# Altium PCB ESP-WROOM32.PcbDoc (part 2 of 3)
Units mm, origin at the board's own origin, x right, y up, seen from the top; angles counter-clockwise.
Board outline 17.3 x 15.5 mm, 2 copper layers (L1, L2); 42 components, 55 nets, 176 pads, 91 vias.
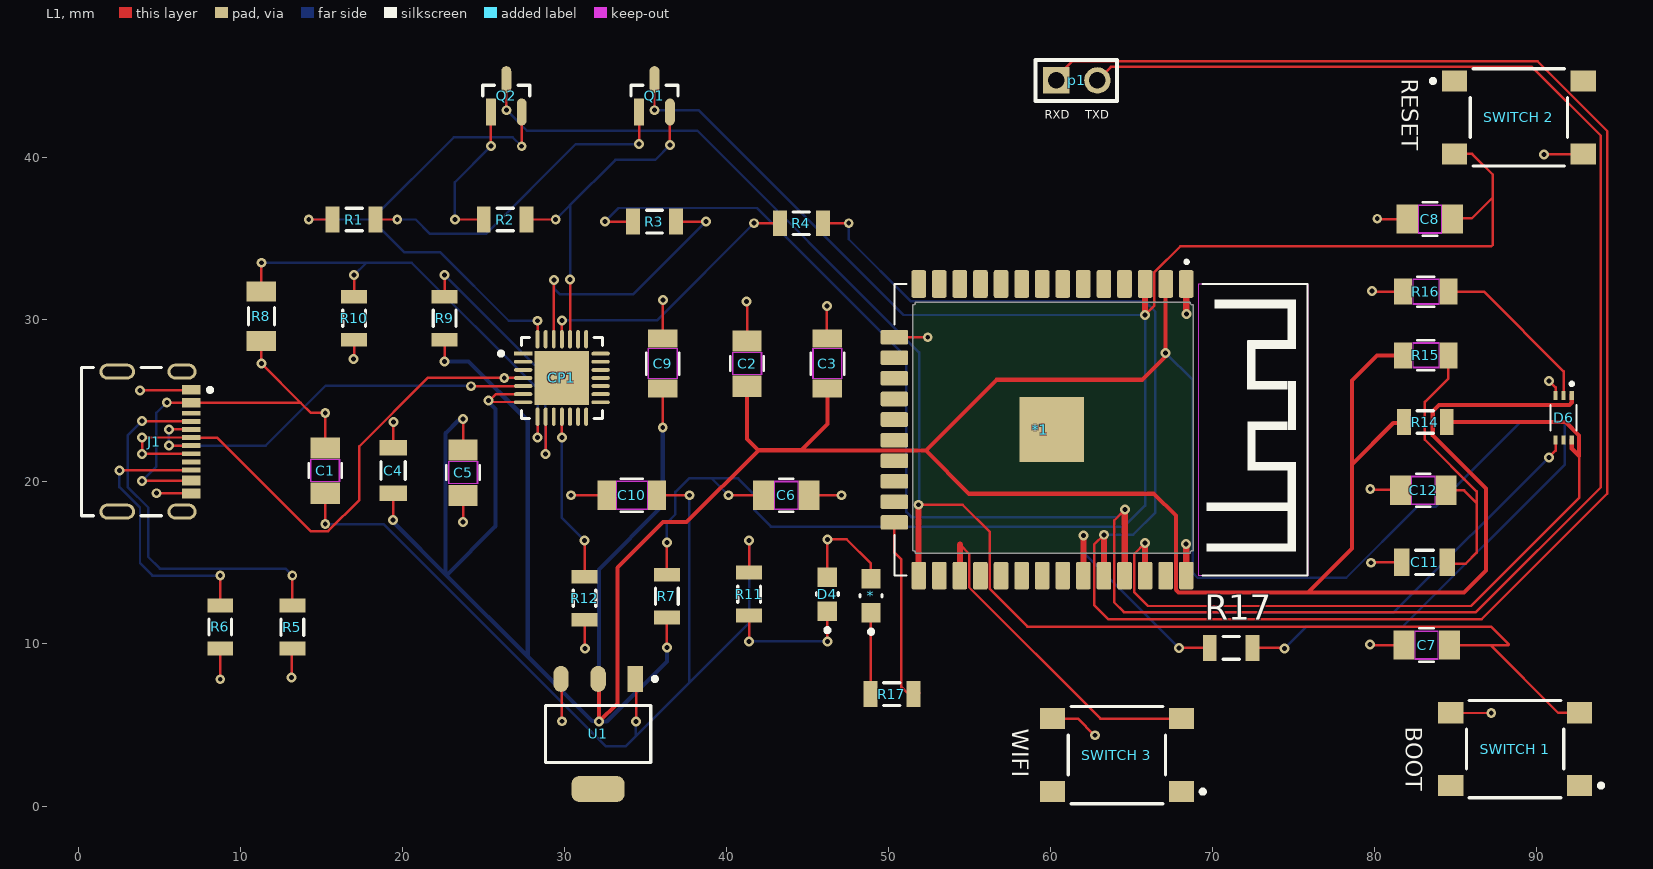
[diagram p0: L1 view]

## Part data (continued)
R5 R6: library part RC1206FR-075K1L, "RES 5.1K OHM 1% 1/4W 1206", Case Code (Imperial)=0402, LCSC part number=C163372, Manufacturer="Yageo Group", Manufacturer Part Number=RC0402FR-075K1L, Max Operating Temperature=155°C, Max Power Dissipation=63mW, Min Operating Temperature=-55°C, Power Dissipation=62.5mW, Supplier Part Number=311-5.10KLRCT-ND, Temperature Coefficient=100ppm/°C, Tolerance=1%, Voltage Rating=50V, Case/Package=0402, Category="Chip SMD Resistors", China RoHS=Non-Compliant, ComponentLink1Description=https://datasheet.octopart.com:443/RC0402FR-075K1L-Yageo-datasheet-175887523.pdf?src-supplier=IHS, ComponentLink1URL=https://datasheet.octopart.com:443/RC0402FR-075K1L-Yageo-datasheet-175887523.pdf?src-supplier=IHS, ComponentLink2Description=https://datasheet.octopart.com:443/RC0402FR-075K1L-Yageo-datasheet-103092701.pdf?src-supplier=Upverter, ComponentLink2URL=https://datasheet.octopart.com:443/RC0402FR-075K1L-Yageo-datasheet-103092701.pdf?src-supplier=Upverter, ComponentLink3Description=https://datasheet.octopart.com:443/RC0402FR-075K1L-Yageo-datasheet-10408619.pdf?src-supplier=Newark, ComponentLink3URL=https://datasheet.octopart.com:443/RC0402FR-075K1L-Yageo-datasheet-10408619.pdf?src-supplier=Newark, ComponentLink4Description=https://datasheet.octopart.com:443/RC0402FR-075K1L-Yageo-datasheet-8324527.pdf?src-supplier=Newark, ComponentLink4URL=https://datasheet.octopart.com:443/RC0402FR-075K1L-Yageo-datasheet-8324527.pdf?src-supplier=Newark, ComponentLink5Description=https://datasheet.octopart.com:443/RC0402FR-075K1L-Yageo-datasheet-62067350.pdf?src-supplier=element14+APAC, ComponentLink5URL=https://datasheet.octopart.com:443/RC0402FR-075K1L-Yageo-datasheet-62067350.pdf?src-supplier=element14+APAC, ComponentLink6Description=https://datasheet.octopart.com:443/RC0402FR-075K1L-Yageo-datasheet-164759695.pdf?src-supplier=Future+Electronics, ComponentLink6URL=https://datasheet.octopart.com:443/RC0402FR-075K1L-Yageo-datasheet-164759695.pdf?src-supplier=Future+Electronics, ComponentLink7Description=https://datasheet.octopart.com:443/RC0402FR-075K1L-Yageo-datasheet-137700087.pdf?src-supplier=Future+Electronics, ComponentLink7URL=https://datasheet.octopart.com:443/RC0402FR-075K1L-Yageo-datasheet-137700087.pdf?src-supplier=Future+Electronics, ComponentLink8Description=https://datasheet.octopart.com:443/RC0402FR-075K1L-Yageo-datasheet-12531192.pdf?src-supplier=Future+Electronics, ComponentLink8URL=https://datasheet.octopart.com:443/RC0402FR-075K1L-Yageo-datasheet-12531192.pdf?src-supplier=Future+Electronics, ComponentLink9Description=https://datasheet.octopart.com:443/RC0402FR-075K1L-Yageo-datasheet-505231.pdf?src-supplier=Future+Electronics, ComponentLink9URL=https://datasheet.octopart.com:443/RC0402FR-075K1L-Yageo-datasheet-505231.pdf?src-supplier=Future+Electronics, ComponentLink10Description=https://datasheet.octopart.com:443/RC0402FR-075K1L-Yageo-datasheet-148775077.pdf?src-supplier=TME, ComponentLink10URL=https://datasheet.octopart.com:443/RC0402FR-075K1L-Yageo-datasheet-148775077.pdf?src-supplier=TME, ComponentLink11Description=https://datasheet.octopart.com/RC0402FR-075K1L-Yageo-datasheet-73766026.pdf, ComponentLink11URL=https://datasheet.octopart.com/RC0402FR-075K1L-Yageo-datasheet-73766026.pdf, ComponentLink12Description=https://datasheet.octopart.com:443/RC0402FR-075K1L-Yageo-datasheet-8329306.pdf?src-supplier=element14, ComponentLink12URL=https://datasheet.octopart.com:443/RC0402FR-075K1L-Yageo-datasheet-8329306.pdf?src-supplier=element14, ComponentLink13Description=http://sigma.octopart.com:80/rohs_statement/Yageo-company-2.pdf?src-supplier=Compliance+Statements, ComponentLink13URL=http://sigma.octopart.com:80/rohs_statement/Yageo-company-2.pdf?src-supplier=Compliance+Statements, ComponentLink14Description=http://sigma.octopart.com:80/conflict_mineral_statement/Yageo-company-3.pdf?src-supplier=Compliance+Statements, ComponentLink14URL=http://sigma.octopart.com:80/conflict_mineral_statement/Yageo-company-3.pdf?src-supplier=Compliance+Statements, Composition="Thick Film", Depth=500µm, Features="Moisture Resistant", Height=350µm, Lead Free="Lead Free", Length=1mm, Lifecycle Status=Production, Military Standard=Not, Mounting Technology="Surface Mount", Number of Terminals=2, Number of Terminations=2, Packaging="Cut Tape", Pins=2, Power Rating=63mW, Pricing="1=0.1, 10=0.008, 25=0.0072, 50=0.0062, 100=0.0056, 250=0.00308 (USD)", REACH SVHC=Yes, RoHS=Compliant, Schedule B="8533210045, 8533210045|8533210045, 8533210045|8533210045|8533210045, 8533210045|8533210045|8533210045|8533210045", Stock=251126, Supplier=DigiKey, Termination=SMD/SMT, Voltage Rating (DC)=50V, Width=500µm, Working Voltage=50V
R8: library part RC1206FR-0722K1L, "RES 22.1K OHM 1% 1/4W 1206", Case Code (Imperial)=0402, Case Code (Metric)=1005, LCSC part number=C488737, Manufacturer="Yageo Group", Manufacturer Part Number=AC0402FR-0722K1L, Max Operating Temperature=155°C, Max Power Dissipation=63mW, Min Operating Temperature=-55°C, Power Dissipation=62.5mW, Supplier Part Number=YAG3457CT-ND, Temperature Coefficient=100ppm/°C, Tolerance=1%, Voltage Rating=50V, Case/Package=0402, Category="Chip SMD Resistors", China RoHS=Non-Compliant, ComponentLink1Description=https://datasheet.octopart.com:443/AC0402FR-0722K1L-Yageo-datasheet-182189377.pdf?src-supplier=IHS, ComponentLink1URL=https://datasheet.octopart.com:443/AC0402FR-0722K1L-Yageo-datasheet-182189377.pdf?src-supplier=IHS, ComponentLink2Description=https://datasheet.octopart.com:443/AC0402FR-0722K1L-Yageo-datasheet-83209224.pdf?src-supplier=Upverter, ComponentLink2URL=https://datasheet.octopart.com:443/AC0402FR-0722K1L-Yageo-datasheet-83209224.pdf?src-supplier=Upverter, ComponentLink3Description=https://datasheet.octopart.com:443/AC0402FR-0722K1L-Yageo-datasheet-178509465.pdf?src-supplier=Newark, ComponentLink3URL=https://datasheet.octopart.com:443/AC0402FR-0722K1L-Yageo-datasheet-178509465.pdf?src-supplier=Newark, ComponentLink4Description=https://datasheet.octopart.com:443/AC0402FR-0722K1L-Yageo-datasheet-166720450.pdf?src-supplier=Future+Electronics, ComponentLink4URL=https://datasheet.octopart.com:443/AC0402FR-0722K1L-Yageo-datasheet-166720450.pdf?src-supplier=Future+Electronics, ComponentLink5Description=https://datasheet.octopart.com:443/AC0402FR-0722K1L-Yageo-datasheet-151884373.pdf?src-supplier=Future+Electronics, ComponentLink5URL=https://datasheet.octopart.com:443/AC0402FR-0722K1L-Yageo-datasheet-151884373.pdf?src-supplier=Future+Electronics, ComponentLink6Description=https://datasheet.octopart.com:443/AC0402FR-0722K1L-Yageo-datasheet-137699919.pdf?src-supplier=Future+Electronics, ComponentLink6URL=https://datasheet.octopart.com:443/AC0402FR-0722K1L-Yageo-datasheet-137699919.pdf?src-supplier=Future+Electronics, ComponentLink7Description=https://datasheet.octopart.com:443/AC0402FR-0722K1L-Yageo-datasheet-86786639.pdf?src-supplier=Future+Electronics, ComponentLink7URL=https://datasheet.octopart.com:443/AC0402FR-0722K1L-Yageo-datasheet-86786639.pdf?src-supplier=Future+Electronics, ComponentLink8Description=https://datasheet.octopart.com:443/AC0402FR-0722K1L-Yageo-datasheet-128677973.pdf?src-supplier=X-ON, ComponentLink8URL=https://datasheet.octopart.com:443/AC0402FR-0722K1L-Yageo-datasheet-128677973.pdf?src-supplier=X-ON, ComponentLink9Description=https://datasheet.octopart.com/AC0402FR-0722K1L-Yageo-datasheet-12512238.pdf, ComponentLink9URL=https://datasheet.octopart.com/AC0402FR-0722K1L-Yageo-datasheet-12512238.pdf, ComponentLink10Description=http://sigma.octopart.com:80/rohs_statement/Yageo-company-2.pdf?src-supplier=Compliance+Statements, ComponentLink10URL=http://sigma.octopart.com:80/rohs_statement/Yageo-company-2.pdf?src-supplier=Compliance+Statements, ComponentLink11Description=http://sigma.octopart.com:80/conflict_mineral_statement/Yageo-company-3.pdf?src-supplier=Compliance+Statements, ComponentLink11URL=http://sigma.octopart.com:80/conflict_mineral_statement/Yageo-company-3.pdf?src-supplier=Compliance+Statements, Composition="Thick Film", Features="Automotive AEC-Q200, Moisture Resistant", Height=320µm, Length=990.6µm, Lifecycle Status=Production, Mounting Technology="Surface Mount", Number of Terminals=2, Number of Terminations=2, Packaging="Tape & Reel", Power Rating=62.5mW, Pricing="1=0.1, 10=0.009, 25=0.008, 50=0.0072, 100=0.0066, 250=0.00408, 500=0.00406 (USD)", REACH SVHC=Yes, RoHS=Compliant, Schedule B="8533210045, 8533210045|8533210045|8533210045|8533210045|8533210045", Stock=23159, Supplier=DigiKey, Width=500µm, Working Voltage=50V
R9: library part RC1206JR-132KL, "RES 2K OHM 5% 1/4W 1206", Case Code (Imperial)=0402, Case Code (Metric)=3216, LCSC part number=C108081, Manufacturer="Yageo Group", Manufacturer Part Number=RC0402JR-072KL, Max Operating Temperature=155°C, Min Operating Temperature=-55°C, Power Dissipation=62.5mW, Supplier Part Number=311-2.0KJRCT-ND, Temperature Coefficient=100ppm/°C, Tolerance=5%, Voltage Rating=50V, Case/Package=0402, Category="Chip SMD Resistors", China RoHS=Non-Compliant, ComponentLink1Description=https://datasheet.octopart.com:443/RC0402JR-072KL-Yageo-datasheet-175887523.pdf?src-supplier=Newark, ComponentLink1URL=https://datasheet.octopart.com:443/RC0402JR-072KL-Yageo-datasheet-175887523.pdf?src-supplier=Newark, ComponentLink2Description=https://datasheet.octopart.com:443/RC0402JR-072KL-Yageo-datasheet-10408619.pdf?src-supplier=Farnell, ComponentLink2URL=https://datasheet.octopart.com:443/RC0402JR-072KL-Yageo-datasheet-10408619.pdf?src-supplier=Farnell, ComponentLink3Description=https://datasheet.octopart.com:443/RC0402JR-072KL-Yageo-datasheet-62067350.pdf?src-supplier=Farnell, ComponentLink3URL=https://datasheet.octopart.com:443/RC0402JR-072KL-Yageo-datasheet-62067350.pdf?src-supplier=Farnell, ComponentLink4Description=https://datasheet.octopart.com:443/RC0402JR-072KL-Yageo-datasheet-164759695.pdf?src-supplier=Future+Electronics, ComponentLink4URL=https://datasheet.octopart.com:443/RC0402JR-072KL-Yageo-datasheet-164759695.pdf?src-supplier=Future+Electronics, ComponentLink5Description=https://datasheet.octopart.com:443/RC0402JR-072KL-Yageo-datasheet-137700087.pdf?src-supplier=Future+Electronics, ComponentLink5URL=https://datasheet.octopart.com:443/RC0402JR-072KL-Yageo-datasheet-137700087.pdf?src-supplier=Future+Electronics, ComponentLink6Description=https://datasheet.octopart.com:443/RC0402JR-072KL-Yageo-datasheet-12531192.pdf?src-supplier=Future+Electronics, ComponentLink6URL=https://datasheet.octopart.com:443/RC0402JR-072KL-Yageo-datasheet-12531192.pdf?src-supplier=Future+Electronics, ComponentLink7Description=https://datasheet.octopart.com:443/RC0402JR-072KL-Yageo-datasheet-505231.pdf?src-supplier=Future+Electronics, ComponentLink7URL=https://datasheet.octopart.com:443/RC0402JR-072KL-Yageo-datasheet-505231.pdf?src-supplier=Future+Electronics, ComponentLink8Description=https://datasheet.octopart.com/RC0402JR-072KL-Yageo-datasheet-73766026.pdf, ComponentLink8URL=https://datasheet.octopart.com/RC0402JR-072KL-Yageo-datasheet-73766026.pdf, ComponentLink9Description=https://datasheet.octopart.com:443/RC0402JR-072KL-Yageo-datasheet-8329306.pdf?src-supplier=element14, ComponentLink9URL=https://datasheet.octopart.com:443/RC0402JR-072KL-Yageo-datasheet-8329306.pdf?src-supplier=element14, ComponentLink10Description=https://datasheet.octopart.com:443/RC0402JR-072KL-Yageo-datasheet-8324527.pdf?src-supplier=TME, ComponentLink10URL=https://datasheet.octopart.com:443/RC0402JR-072KL-Yageo-datasheet-8324527.pdf?src-supplier=TME, ComponentLink11Description=http://sigma.octopart.com:80/rohs_statement/Yageo-company-2.pdf?src-supplier=Compliance+Statements, ComponentLink11URL=http://sigma.octopart.com:80/rohs_statement/Yageo-company-2.pdf?src-supplier=Compliance+Statements, ComponentLink12Description=http://sigma.octopart.com:80/conflict_mineral_statement/Yageo-company-3.pdf?src-supplier=Compliance+Statements, ComponentLink12URL=http://sigma.octopart.com:80/conflict_mineral_statement/Yageo-company-3.pdf?src-supplier=Compliance+Statements, ComponentLink13Description=https://datasheet.octopart.com:443/RC1206JR-132KL-Yageo-datasheet-175887523.pdf?src-supplier=IHS, ComponentLink13URL=https://datasheet.octopart.com:443/RC1206JR-132KL-Yageo-datasheet-175887523.pdf?src-supplier=IHS, ComponentLink14Description=https://datasheet.octopart.com:443/RC1206JR-132KL-Yageo-datasheet-164759695.pdf?src-supplier=Future+Electronics, ComponentLink14URL=https://datasheet.octopart.com:443/RC1206JR-132KL-Yageo-datasheet-164759695.pdf?src-supplier=Future+Electronics, ComponentLink15Description=https://datasheet.octopart.com:443/RC1206JR-132KL-Yageo-datasheet-137700087.pdf?src-supplier=Future+Electronics, ComponentLink15URL=https://datasheet.octopart.com:443/RC1206JR-132KL-Yageo-datasheet-137700087.pdf?src-supplier=Future+Electronics, ComponentLink16Description=https://datasheet.octopart.com:443/RC1206JR-132KL-Yageo-datasheet-27233761.pdf?src-supplier=Future+Electronics, ComponentLink16URL=https://datasheet.octopart.com:443/RC1206JR-132KL-Yageo-datasheet-27233761.pdf?src-supplier=Future+Electronics, ComponentLink17Description=https://datasheet.octopart.com:443/RC1206JR-132KL-Yageo-datasheet-13032847.pdf?src-supplier=Future+Electronics, ComponentLink17URL=https://datasheet.octopart.com:443/RC1206JR-132KL-Yageo-datasheet-13032847.pdf?src-supplier=Future+Electronics, ComponentLink18Description=https://datasheet.octopart.com:443/RC1206JR-132KL-Yageo-datasheet-8359522.pdf?src-supplier=Future+Electronics, ComponentLink18URL=https://datasheet.octopart.com:443/RC1206JR-132KL-Yageo-datasheet-8359522.pdf?src-supplier=Future+Electronics, ComponentLink19Description=https://datasheet.octopart.com/RC1206JR-132KL-Yageo-datasheet-73766026.pdf, ComponentLink19URL=https://datasheet.octopart.com/RC1206JR-132KL-Yageo-datasheet-73766026.pdf, Composition="Thick Film", Contact Plating=Tin, Depth=500µm, Height=350µm, Lead Free="Lead Free", Length=1mm, Lifecycle Status=Production, Military Standard=Not, Mounting Technology="Surface Mount", Number of Terminals=2, Packaging="Tape & Reel", Pins=2, Power Rating=62.5mW, Pricing="1=0.1, 10=0.006, 25=0.0056, 50=0.0052, 100=0.0046, 250=0.00416, 500=0.00284 (USD)", Radiation Hardening=No, REACH SVHC=Yes, RoHS=Compliant, Schedule B="8533210045, 8533210045|8533210045|8533210045|8533210045|8533210045", Stock=102655, Supplier=DigiKey, Termination=SMD/SMT, Voltage Rating (DC)=50V, Width=500µm, Working Voltage=50V
R10: library part RC1206FR-0747K5L, "RES 47.5K OHM 1% 1/4W 1206", Case Code (Imperial)=1206, Case Code (Metric)=3216, Case/Package=0402, LCSC part number=C137271, Manufacturer="Yageo Group", Manufacturer Part Number=RC0402FR-1347K5L, Max Operating Temperature=155°C, Max Power Dissipation=250mW, Min Operating Temperature=-55°C, Power Dissipation=62.5mW, Supplier Part Number=13-RC0402FR-1347K5LCT-ND, Temperature Coefficient=100ppm/°C, Tolerance=1%, Voltage Rating=200V, Working Voltage=50V, Category="Chip SMD Resistors", China RoHS=Non-Compliant, ComponentLink1Description=https://datasheet.octopart.com:443/RC0402FR-1347K5L-Yageo-datasheet-175887523.pdf?src-supplier=IHS, ComponentLink1URL=https://datasheet.octopart.com:443/RC0402FR-1347K5L-Yageo-datasheet-175887523.pdf?src-supplier=IHS, ComponentLink2Description=https://datasheet.octopart.com:443/RC0402FR-1347K5L-Yageo-Group-datasheet-189192902.pdf?src-supplier=TME, ComponentLink2URL=https://datasheet.octopart.com:443/RC0402FR-1347K5L-Yageo-Group-datasheet-189192902.pdf?src-supplier=TME, ComponentLink3Description=https://datasheet.octopart.com:443/RC0402FR-1347K5L-Yageo-Group-datasheet-176638170.pdf?src-supplier=TME, ComponentLink3URL=https://datasheet.octopart.com:443/RC0402FR-1347K5L-Yageo-Group-datasheet-176638170.pdf?src-supplier=TME, ComponentLink4Description=https://datasheet.octopart.com/RC0402FR-1347K5L-Yageo-datasheet-73766026.pdf, ComponentLink4URL=https://datasheet.octopart.com/RC0402FR-1347K5L-Yageo-datasheet-73766026.pdf, ComponentLink5Description=https://datasheet.octopart.com:443/RC0402FR-1347K5L-Yageo-datasheet-10408619.pdf?src-supplier=_legacy+Avnet, ComponentLink5URL=https://datasheet.octopart.com:443/RC0402FR-1347K5L-Yageo-datasheet-10408619.pdf?src-supplier=_legacy+Avnet, ComponentLink6Description=http://sigma.octopart.com:80/conflict_mineral_statement/Yageo-company-3.pdf?src-supplier=Compliance+Statements, ComponentLink6URL=http://sigma.octopart.com:80/conflict_mineral_statement/Yageo-company-3.pdf?src-supplier=Compliance+Statements, ComponentLink7Description=http://sigma.octopart.com:80/rohs_statement/Yageo-company-2.pdf?src-supplier=Compliance+Statements, ComponentLink7URL=http://sigma.octopart.com:80/rohs_statement/Yageo-company-2.pdf?src-supplier=Compliance+Statements, ComponentLink8Description=https://datasheet.octopart.com:443/RC1206FR-0747K5L-Yageo-datasheet-175887523.pdf?src-supplier=Newark, ComponentLink8URL=https://datasheet.octopart.com:443/RC1206FR-0747K5L-Yageo-datasheet-175887523.pdf?src-supplier=Newark, ComponentLink9Description=https://datasheet.octopart.com:443/RC1206FR-0747K5L-Yageo-datasheet-103092701.pdf?src-supplier=Upverter, ComponentLink9URL=https://datasheet.octopart.com:443/RC1206FR-0747K5L-Yageo-datasheet-103092701.pdf?src-supplier=Upverter, ComponentLink10Description=https://datasheet.octopart.com:443/RC1206FR-0747K5L-Yageo-Group-datasheet-189192902.pdf?src-supplier=TME, ComponentLink10URL=https://datasheet.octopart.com:443/RC1206FR-0747K5L-Yageo-Group-datasheet-189192902.pdf?src-supplier=TME, ComponentLink11Description=https://datasheet.octopart.com:443/RC1206FR-0747K5L-Yageo-Group-datasheet-176638170.pdf?src-supplier=TME, ComponentLink11URL=https://datasheet.octopart.com:443/RC1206FR-0747K5L-Yageo-Group-datasheet-176638170.pdf?src-supplier=TME, ComponentLink12Description=https://datasheet.octopart.com:443/RC1206FR-0747K5L-Yageo-datasheet-164759695.pdf?src-supplier=Future+Electronics, ComponentLink12URL=https://datasheet.octopart.com:443/RC1206FR-0747K5L-Yageo-datasheet-164759695.pdf?src-supplier=Future+Electronics, ComponentLink13Description=https://datasheet.octopart.com:443/RC1206FR-0747K5L-Yageo-datasheet-137700087.pdf?src-supplier=Future+Electronics, ComponentLink13URL=https://datasheet.octopart.com:443/RC1206FR-0747K5L-Yageo-datasheet-137700087.pdf?src-supplier=Future+Electronics, ComponentLink14Description=https://datasheet.octopart.com:443/RC1206FR-0747K5L-Yageo-datasheet-27233761.pdf?src-supplier=Future+Electronics, ComponentLink14URL=https://datasheet.octopart.com:443/RC1206FR-0747K5L-Yageo-datasheet-27233761.pdf?src-supplier=Future+Electronics, ComponentLink15Description=https://datasheet.octopart.com:443/RC1206FR-0747K5L-Yageo-datasheet-13032847.pdf?src-supplier=Future+Electronics, ComponentLink15URL=https://datasheet.octopart.com:443/RC1206FR-0747K5L-Yageo-datasheet-13032847.pdf?src-supplier=Future+Electronics, ComponentLink16Description=https://datasheet.octopart.com:443/RC1206FR-0747K5L-Yageo-datasheet-8359522.pdf?src-supplier=Future+Electronics, ComponentLink16URL=https://datasheet.octopart.com:443/RC1206FR-0747K5L-Yageo-datasheet-8359522.pdf?src-supplier=Future+Electronics, ComponentLink17Description=https://datasheet.octopart.com/RC1206FR-0747K5L-Yageo-datasheet-73766026.pdf, ComponentLink17URL=https://datasheet.octopart.com/RC1206FR-0747K5L-Yageo-datasheet-73766026.pdf, ComponentLink18Description=https://datasheet.octopart.com:443/RC1206FR-0747K5L-Yageo-datasheet-118639.pdf?src-supplier=DigiKey, ComponentLink18URL=https://datasheet.octopart.com:443/RC1206FR-0747K5L-Yageo-datasheet-118639.pdf?src-supplier=DigiKey, Composition="Thick Film", Contact Plating=Tin, Depth=500µm, Features="Moisture Resistant", Height=350µm, Lead Free="Lead Free", Length=1mm, Lifecycle Status=Production, Military Standard=Not, Mounting Technology="Surface Mount", Number of Terminals=2, Number of Terminations=2, Packaging="Tape & Reel", Power Rating=250mW, Pricing="1=0.1, 10=0.02, 25=0.014, 50=0.0112, 100=0.009, 250=0.00688, 500=0.00566, 1000=0.00474, 5000=0.00328 (USD)", REACH SVHC=Yes, RoHS=Compliant, Schedule B="8533210045, 8533210045|8533210045|8533210045|8533210045|8533210045|8533210045|8533210045|8533210045|8533210045|8533210045|8533210045|8533210045|8533210045|8533210045|8533210045|8533210045, 8533210045|8533210045|8533210045|8533210045|8533210045|8533210045|8533210045|8533210045|8533210045|8533210045|8533210045|8533210045|8533210045|8533210045|8533210045|8533210045|8533210045, 8533210045|8533210045|8533210045|8533210045|8533210045|8533210045|8533210045|8533210045|8533210045|8533210045|8533210045|8533210045|8533210045|8533210045|8533210045|8533210045|8533210045|8533210045", Stock=75939, Supplier=DigiKey, Termination=SMD/SMT, Voltage Rating (DC)=200V, Width=500µm
R14 R17 R17: library part RC1206JR-074K7L, "RES 4.7K OHM 5% 1/4W 1206", Case Code (Imperial)=0402, Case Code (Metric)=3216, LCSC part number=C136458, Manufacturer="Yageo Group", Manufacturer Part Number=RC0402JR-0747KL, Max Operating Temperature=155°C, Max Power Dissipation=63mW, Min Operating Temperature=-55°C, Power Dissipation=62.5mW, Supplier Part Number=311-47KJRCT-ND, Temperature Coefficient=100ppm/°C, Tolerance=5%, Voltage Rating=50V, Case/Package=0402, Category="Chip SMD Resistors", China RoHS=Non-Compliant, ComponentLink1Description=https://datasheet.octopart.com:443/RC0402JR-0747KL-Yageo-datasheet-175887523.pdf?src-supplier=IHS, ComponentLink1URL=https://datasheet.octopart.com:443/RC0402JR-0747KL-Yageo-datasheet-175887523.pdf?src-supplier=IHS, ComponentLink2Description=https://datasheet.octopart.com:443/RC0402JR-0747KL-Yageo-datasheet-10408619.pdf?src-supplier=Newark, ComponentLink2URL=https://datasheet.octopart.com:443/RC0402JR-0747KL-Yageo-datasheet-10408619.pdf?src-supplier=Newark, ComponentLink3Description=https://datasheet.octopart.com:443/RC0402JR-0747KL-Yageo-datasheet-8324527.pdf?src-supplier=Newark, ComponentLink3URL=https://datasheet.octopart.com:443/RC0402JR-0747KL-Yageo-datasheet-8324527.pdf?src-supplier=Newark, ComponentLink4Description=https://datasheet.octopart.com:443/RC0402JR-0747KL-Yageo-datasheet-98239111.pdf?src-supplier=Upverter, ComponentLink4URL=https://datasheet.octopart.com:443/RC0402JR-0747KL-Yageo-datasheet-98239111.pdf?src-supplier=Upverter, ComponentLink5Description=https://datasheet.octopart.com:443/RC0402JR-0747KL-Yageo-datasheet-62067350.pdf?src-supplier=element14+APAC, ComponentLink5URL=https://datasheet.octopart.com:443/RC0402JR-0747KL-Yageo-datasheet-62067350.pdf?src-supplier=element14+APAC, ComponentLink6Description=https://datasheet.octopart.com:443/RC0402JR-0747KL-Yageo-datasheet-176638170.pdf?src-supplier=JRH+Electronics, ComponentLink6URL=https://datasheet.octopart.com:443/RC0402JR-0747KL-Yageo-datasheet-176638170.pdf?src-supplier=JRH+Electronics, ComponentLink7Description=https://datasheet.octopart.com:443/RC0402JR-0747KL-Yageo-datasheet-164759695.pdf?src-supplier=Future+Electronics, ComponentLink7URL=https://datasheet.octopart.com:443/RC0402JR-0747KL-Yageo-datasheet-164759695.pdf?src-supplier=Future+Electronics, ComponentLink8Description=https://datasheet.octopart.com:443/RC0402JR-0747KL-Yageo-datasheet-137700087.pdf?src-supplier=Future+Electronics, ComponentLink8URL=https://datasheet.octopart.com:443/RC0402JR-0747KL-Yageo-datasheet-137700087.pdf?src-supplier=Future+Electronics, ComponentLink9Description=https://datasheet.octopart.com:443/RC0402JR-0747KL-Yageo-datasheet-12531192.pdf?src-supplier=Future+Electronics, ComponentLink9URL=https://datasheet.octopart.com:443/RC0402JR-0747KL-Yageo-datasheet-12531192.pdf?src-supplier=Future+Electronics, ComponentLink10Description=https://datasheet.octopart.com:443/RC0402JR-0747KL-Yageo-datasheet-8324255.pdf?src-supplier=Future+Electronics, ComponentLink10URL=https://datasheet.octopart.com:443/RC0402JR-0747KL-Yageo-datasheet-8324255.pdf?src-supplier=Future+Electronics, ComponentLink11Description=https://datasheet.octopart.com:443/RC0402JR-0747KL-Yageo-datasheet-148775077.pdf?src-supplier=TME, ComponentLink11URL=https://datasheet.octopart.com:443/RC0402JR-0747KL-Yageo-datasheet-148775077.pdf?src-supplier=TME, ComponentLink12Description=https://datasheet.octopart.com/RC0402JR-0747KL-Yageo-datasheet-73766026.pdf, ComponentLink12URL=https://datasheet.octopart.com/RC0402JR-0747KL-Yageo-datasheet-73766026.pdf, ComponentLink13Description=https://datasheet.octopart.com:443/RC0402JR-0747KL-Yageo-datasheet-8329306.pdf?src-supplier=element14, ComponentLink13URL=https://datasheet.octopart.com:443/RC0402JR-0747KL-Yageo-datasheet-8329306.pdf?src-supplier=element14, ComponentLink14Description=http://sigma.octopart.com:80/rohs_statement/Yageo-company-2.pdf?src-supplier=Compliance+Statements, ComponentLink14URL=http://sigma.octopart.com:80/rohs_statement/Yageo-company-2.pdf?src-supplier=Compliance+Statements, ComponentLink15Description=http://sigma.octopart.com:80/conflict_mineral_statement/Yageo-company-3.pdf?src-supplier=Compliance+Statements, ComponentLink15URL=http://sigma.octopart.com:80/conflict_mineral_statement/Yageo-company-3.pdf?src-supplier=Compliance+Statements, ComponentLink16Description=https://datasheet.octopart.com:443/RC1206JR-074K7L-Yageo-datasheet-175887523.pdf?src-supplier=Newark, ComponentLink16URL=https://datasheet.octopart.com:443/RC1206JR-074K7L-Yageo-datasheet-175887523.pdf?src-supplier=Newark, ComponentLink17Description=https://datasheet.octopart.com:443/RC1206JR-074K7L-Yageo-datasheet-12512621.pdf?src-supplier=Newark, ComponentLink17URL=https://datasheet.octopart.com:443/RC1206JR-074K7L-Yageo-datasheet-12512621.pdf?src-supplier=Newark, ComponentLink18Description=https://datasheet.octopart.com:443/RC1206JR-074K7L-Yageo-datasheet-141435363.pdf?src-supplier=Upverter, ComponentLink18URL=https://datasheet.octopart.com:443/RC1206JR-074K7L-Yageo-datasheet-141435363.pdf?src-supplier=Upverter, ComponentLink19Description=https://datasheet.octopart.com:443/RC1206JR-074K7L-Yageo-datasheet-8359522.pdf?src-supplier=element14+APAC, ComponentLink19URL=https://datasheet.octopart.com:443/RC1206JR-074K7L-Yageo-datasheet-8359522.pdf?src-supplier=element14+APAC, ComponentLink20Description=https://datasheet.octopart.com:443/RC1206JR-074K7L-Yageo-datasheet-62067350.pdf?src-supplier=Farnell, ComponentLink20URL=https://datasheet.octopart.com:443/RC1206JR-074K7L-Yageo-datasheet-62067350.pdf?src-supplier=Farnell, ComponentLink21Description=https://datasheet.octopart.com:443/RC1206JR-074K7L-Yageo-datasheet-164759695.pdf?src-supplier=Future+Electronics, ComponentLink21URL=https://datasheet.octopart.com:443/RC1206JR-074K7L-Yageo-datasheet-164759695.pdf?src-supplier=Future+Electronics, ComponentLink22Description=https://datasheet.octopart.com:443/RC1206JR-074K7L-Yageo-datasheet-127823281.pdf?src-supplier=Future+Electronics, ComponentLink22URL=https://datasheet.octopart.com:443/RC1206JR-074K7L-Yageo-datasheet-127823281.pdf?src-supplier=Future+Electronics, ComponentLink23Description=https://datasheet.octopart.com:443/RC1206JR-074K7L-Yageo-datasheet-137700087.pdf?src-supplier=Future+Electronics, ComponentLink23URL=https://datasheet.octopart.com:443/RC1206JR-074K7L-Yageo-datasheet-137700087.pdf?src-supplier=Future+Electronics, ComponentLink24Description=https://datasheet.octopart.com:443/RC1206JR-074K7L-Yageo-datasheet-103092701.pdf?src-supplier=Future+Electronics, ComponentLink24URL=https://datasheet.octopart.com:443/RC1206JR-074K7L-Yageo-datasheet-103092701.pdf?src-supplier=Future+Electronics, ComponentLink25Description=https://datasheet.octopart.com:443/RC1206JR-074K7L-Yageo-datasheet-27233761.pdf?src-supplier=Future+Electronics, ComponentLink25URL=https://datasheet.octopart.com:443/RC1206JR-074K7L-Yageo-datasheet-27233761.pdf?src-supplier=Future+Electronics, ComponentLink26Description=https://datasheet.octopart.com:443/RC1206JR-074K7L-Yageo-datasheet-13032847.pdf?src-supplier=Future+Electronics, ComponentLink26URL=https://datasheet.octopart.com:443/RC1206JR-074K7L-Yageo-datasheet-13032847.pdf?src-supplier=Future+Electronics, ComponentLink27Description=https://datasheet.octopart.com:443/RC1206JR-074K7L-Yageo-datasheet-8324387.pdf?src-supplier=Future+Electronics, ComponentLink27URL=https://datasheet.octopart.com:443/RC1206JR-074K7L-Yageo-datasheet-8324387.pdf?src-supplier=Future+Electronics, ComponentLink28Description=https://datasheet.octopart.com/RC1206JR-074K7L-Yageo-datasheet-73766026.pdf, ComponentLink28URL=https://datasheet.octopart.com/RC1206JR-074K7L-Yageo-datasheet-73766026.pdf, ComponentLink29Description=https://datasheet.octopart.com:443/RC1206JR-074K7L-Yageo-datasheet-118639.pdf?src-supplier=DigiKey, ComponentLink29URL=https://datasheet.octopart.com:443/RC1206JR-074K7L-Yageo-datasheet-118639.pdf?src-supplier=DigiKey, ComponentLink30Description=https://datasheet.octopart.com:443/RC1206JR-074K7L-Yageo-datasheet-499455.pdf?src-supplier=element14, ComponentLink30URL=https://datasheet.octopart.com:443/RC1206JR-074K7L-Yageo-datasheet-499455.pdf?src-supplier=element14, ComponentLink31Description=https://datasheet.octopart.com:443/RC1206JR-074K7L-Yageo-datasheet-6387275.pdf?src-supplier=element14, ComponentLink31URL=https://datasheet.octopart.com:443/RC1206JR-074K7L-Yageo-datasheet-6387275.pdf?src-supplier=element14, Composition="Thick Film", Depth=500µm, Features="Moisture Resistant", Height=350µm, Lead Free="Lead Free", Length=1mm, Lifecycle Status=Production, Military Standard=Not, Mounting Technology="Surface Mount", Number of Terminals=2, Number of Terminations=2, Packaging="Tape & Reel", Pins=2, Power Rating=63mW, Pricing="1=0.1, 10=0.006, 25=0.0044, 50=0.003, 100=0.0028 (USD)", REACH SVHC=Yes, RoHS=Compliant, Schedule B="8533210045, 8533210045|8533210045, 8533210045|8533210045|8533210045, 8533210045|8533210045|8533210045|8533210045", Stock=272791, Supplier=DigiKey, Termination=SMD/SMT, Voltage Rating (AC)=50V, Voltage Rating (DC)=50V, Width=500µm, Working Voltage=50V
R15 R16: library part RC1206JR-071KL, "RES 1K OHM 5% 1/4W 1206", Case Code (Imperial)=0402, Case Code (Metric)=3216, LCSC part number=C105637, LSCS PART NUMBER=C112223, Manufacturer="Yageo Group", Manufacturer Part Number=RC0402JR-071KL, Max Operating Temperature=155°C, Max Power Dissipation=63mW, Min Operating Temperature=-55°C, Power Dissipation=62.5mW, Supplier Part Number=311-1.0KJRCT-ND, Temperature Coefficient=100ppm/°C, Tolerance=5%, Voltage Rating=50V, Case/Package=0402, Category="Chip SMD Resistors", China RoHS=Non-Compliant, ComponentLink1Description=https://datasheet.octopart.com:443/RC0402JR-071KL-Yageo-datasheet-175887523.pdf?src-supplier=Farnell, ComponentLink1URL=https://datasheet.octopart.com:443/RC0402JR-071KL-Yageo-datasheet-175887523.pdf?src-supplier=Farnell, ComponentLink2Description=https://datasheet.octopart.com:443/RC0402JR-071KL-Yageo-datasheet-8324527.pdf?src-supplier=Farnell, ComponentLink2URL=https://datasheet.octopart.com:443/RC0402JR-071KL-Yageo-datasheet-8324527.pdf?src-supplier=Farnell, ComponentLink3Description=https://datasheet.octopart.com:443/RC0402JR-071KL-Yageo-datasheet-10408619.pdf?src-supplier=Newark, ComponentLink3URL=https://datasheet.octopart.com:443/RC0402JR-071KL-Yageo-datasheet-10408619.pdf?src-supplier=Newark, ComponentLink4Description=https://datasheet.octopart.com:443/RC0402JR-071KL-Yageo-datasheet-505231.pdf?src-supplier=Newark, ComponentLink4URL=https://datasheet.octopart.com:443/RC0402JR-071KL-Yageo-datasheet-505231.pdf?src-supplier=Newark, ComponentLink5Description=https://datasheet.octopart.com:443/RC0402JR-071KL-Yageo-datasheet-79472498.pdf?src-supplier=Upverter, ComponentLink5URL=https://datasheet.octopart.com:443/RC0402JR-071KL-Yageo-datasheet-79472498.pdf?src-supplier=Upverter, ComponentLink6Description=https://datasheet.octopart.com:443/RC0402JR-071KL-Yageo-datasheet-44585784.pdf?src-supplier=Upverter, ComponentLink6URL=https://datasheet.octopart.com:443/RC0402JR-071KL-Yageo-datasheet-44585784.pdf?src-supplier=Upverter, ComponentLink7Description=https://datasheet.octopart.com:443/RC0402JR-071KL-Yageo-datasheet-62067350.pdf?src-supplier=element14+APAC, ComponentLink7URL=https://datasheet.octopart.com:443/RC0402JR-071KL-Yageo-datasheet-62067350.pdf?src-supplier=element14+APAC, ComponentLink8Description=https://datasheet.octopart.com:443/RC0402JR-071KL-Yageo-datasheet-148775077.pdf?src-supplier=JRH+Electronics, ComponentLink8URL=https://datasheet.octopart.com:443/RC0402JR-071KL-Yageo-datasheet-148775077.pdf?src-supplier=JRH+Electronics, ComponentLink9Description=https://datasheet.octopart.com:443/RC0402JR-071KL-Yageo-datasheet-12531192.pdf?src-supplier=Seeed+Studio, ComponentLink9URL=https://datasheet.octopart.com:443/RC0402JR-071KL-Yageo-datasheet-12531192.pdf?src-supplier=Seeed+Studio, ComponentLink10Description=https://datasheet.octopart.com:443/RC0402JR-071KL-Yageo-datasheet-164759695.pdf?src-supplier=Future+Electronics, ComponentLink10URL=https://datasheet.octopart.com:443/RC0402JR-071KL-Yageo-datasheet-164759695.pdf?src-supplier=Future+Electronics, ComponentLink11Description=https://datasheet.octopart.com:443/RC0402JR-071KL-Yageo-datasheet-137700087.pdf?src-supplier=Future+Electronics, ComponentLink11URL=https://datasheet.octopart.com:443/RC0402JR-071KL-Yageo-datasheet-137700087.pdf?src-supplier=Future+Electronics, ComponentLink12Description=https://datasheet.octopart.com/RC0402JR-071KL-Yageo-datasheet-73766026.pdf, ComponentLink12URL=https://datasheet.octopart.com/RC0402JR-071KL-Yageo-datasheet-73766026.pdf, ComponentLink13Description=https://datasheet.octopart.com:443/RC0402JR-071KL-Yageo-datasheet-8329306.pdf?src-supplier=element14, ComponentLink13URL=https://datasheet.octopart.com:443/RC0402JR-071KL-Yageo-datasheet-8329306.pdf?src-supplier=element14, ComponentLink14Description=http://sigma.octopart.com:80/rohs_statement/Yageo-company-2.pdf?src-supplier=Compliance+Statements, ComponentLink14URL=http://sigma.octopart.com:80/rohs_statement/Yageo-company-2.pdf?src-supplier=Compliance+Statements, ComponentLink15Description=http://sigma.octopart.com:80/conflict_mineral_statement/Yageo-company-3.pdf?src-supplier=Compliance+Statements, ComponentLink15URL=http://sigma.octopart.com:80/conflict_mineral_statement/Yageo-company-3.pdf?src-supplier=Compliance+Statements, ComponentLink16Description=https://datasheet.octopart.com:443/RC1206JR-071KL-Yageo-datasheet-175887523.pdf?src-supplier=Newark, ComponentLink16URL=https://datasheet.octopart.com:443/RC1206JR-071KL-Yageo-datasheet-175887523.pdf?src-supplier=Newark, ComponentLink17Description=https://datasheet.octopart.com:443/RC1206JR-071KL-Yageo-datasheet-13032847.pdf?src-supplier=element14+APAC, ComponentLink17URL=https://datasheet.octopart.com:443/RC1206JR-071KL-Yageo-datasheet-13032847.pdf?src-supplier=element14+APAC, ComponentLink18Description=https://datasheet.octopart.com:443/RC1206JR-071KL-Yageo-datasheet-62067350.pdf?src-supplier=element14+APAC, ComponentLink18URL=https://datasheet.octopart.com:443/RC1206JR-071KL-Yageo-datasheet-62067350.pdf?src-supplier=element14+APAC, ComponentLink19Description=https://datasheet.octopart.com:443/RC1206JR-071KL-Yageo-datasheet-141265859.pdf?src-supplier=Upverter, ComponentLink19URL=https://datasheet.octopart.com:443/RC1206JR-071KL-Yageo-datasheet-141265859.pdf?src-supplier=Upverter, ComponentLink20Description=https://sigma.octopart.com:443/138820526/technical_drawing/Yageo-RC1206JR-071KL.pdf?src-supplier=Upverter, ComponentLink20URL=https://sigma.octopart.com:443/138820526/technical_drawing/Yageo-RC1206JR-071KL.pdf?src-supplier=Upverter, ComponentLink21Description=https://datasheet.octopart.com:443/RC1206JR-071KL-Yageo-datasheet-8359522.pdf?src-supplier=TME, ComponentLink21URL=https://datasheet.octopart.com:443/RC1206JR-071KL-Yageo-datasheet-8359522.pdf?src-supplier=TME, ComponentLink22Description=https://datasheet.octopart.com:443/RC1206JR-071KL-Yageo-datasheet-164759695.pdf?src-supplier=Future+Electronics, ComponentLink22URL=https://datasheet.octopart.com:443/RC1206JR-071KL-Yageo-datasheet-164759695.pdf?src-supplier=Future+Electronics, ComponentLink23Description=https://datasheet.octopart.com:443/RC1206JR-071KL-Yageo-datasheet-137700087.pdf?src-supplier=Future+Electronics, ComponentLink23URL=https://datasheet.octopart.com:443/RC1206JR-071KL-Yageo-datasheet-137700087.pdf?src-supplier=Future+Electronics, ComponentLink24Description=https://datasheet.octopart.com:443/RC1206JR-071KL-Yageo-datasheet-27233761.pdf?src-supplier=Future+Electronics, ComponentLink24URL=https://datasheet.octopart.com:443/RC1206JR-071KL-Yageo-datasheet-27233761.pdf?src-supplier=Future+Electronics, ComponentLink25Description=https://datasheet.octopart.com:443/RC1206JR-071KL-Yageo-datasheet-8324387.pdf?src-supplier=Future+Electronics, ComponentLink25URL=https://datasheet.octopart.com:443/RC1206JR-071KL-Yageo-datasheet-8324387.pdf?src-supplier=Future+Electronics, ComponentLink26Description=https://datasheet.octopart.com/RC1206JR-071KL-Yageo-datasheet-73766026.pdf, ComponentLink26URL=https://datasheet.octopart.com/RC1206JR-071KL-Yageo-datasheet-73766026.pdf, ComponentLink27Description=https://datasheet.octopart.com:443/RC1206JR-071KL-Yageo-datasheet-118639.pdf?src-supplier=DigiKey, ComponentLink27URL=https://datasheet.octopart.com:443/RC1206JR-071KL-Yageo-datasheet-118639.pdf?src-supplier=DigiKey, ComponentLink28Description=https://datasheet.octopart.com:443/RC1206JR-071KL-Yageo-datasheet-499455.pdf?src-supplier=element14, ComponentLink28URL=https://datasheet.octopart.com:443/RC1206JR-071KL-Yageo-datasheet-499455.pdf?src-supplier=element14, ComponentLink29Description=https://datasheet.octopart.com:443/RC1206JR-071KL-Yageo-datasheet-6387275.pdf?src-supplier=element14, ComponentLink29URL=https://datasheet.octopart.com:443/RC1206JR-071KL-Yageo-datasheet-6387275.pdf?src-supplier=element14, Composition="Thick Film", Depth=500µm, Features="Moisture Resistant", Height=350µm, Lead Free="Lead Free", Length=1mm, Lifecycle Status=Production, Military Standard=Not, Mounting Technology="Surface Mount", Number of Terminals=2, Number of Terminations=2, Packaging="Tape & Reel", Pins=2, Power Rating=62.5mW, Pricing="1=0.1, 10=0.006, 25=0.0052, 50=0.004, 100=0.0036, 250=0.00284 (USD)", REACH SVHC=Yes, RoHS=Compliant, Schedule B="8533210045, 8533210045|8533210045, 8533210045|8533210045|8533210045, 8533210045|8533210045|8533210045|8533210045", Stock=6491283, Supplier=DigiKey, Termination=SMD/SMT, Voltage Rating (AC)=50V, Voltage Rating (DC)=50V, Width=500µm, Working Voltage=50V
"SWITCH 1" "SWITCH 2" "SWITCH 3": "SWITCH TACTILE SPST-NO 0.05A 12V", Color=Black, Contact Current Rating=50mA, Contact Resistance=100mΩ, Insulation Resistance=100GΩ, LCSC part number=C221877, Manufacturer="C&K Components", Max Operating Temperature=60°C, Max Voltage Rating (DC)=12V, Min Operating Temperature=-20°C, Operating Force=1.27N, Supplier Part Number=CKN9088CT-ND, Actuator Material="Nylon, Polyamide", Category="Tactile Switches", ComponentLink1Description=https://datasheet.octopart.com:443/PTS645SL50SMTR92LFS-C%26K-Components-datasheet-169841344.pdf?src-supplier=Newark, ComponentLink1URL=https://datasheet.octopart.com:443/PTS645SL50SMTR92LFS-C%26K-Components-datasheet-169841344.pdf?src-supplier=Newark, ComponentLink2Description=https://datasheet.octopart.com:443/PTS645SL50SMTR92LFS-C%26K-Components-datasheet-27907579.pdf?src-supplier=Newark, ComponentLink2URL=https://datasheet.octopart.com:443/PTS645SL50SMTR92LFS-C%26K-Components-datasheet-27907579.pdf?src-supplier=Newark, ComponentLink3Description=https://datasheet.octopart.com:443/PTS645SL50SMTR92LFS-C%26K-Components-datasheet-67873720.pdf?src-supplier=Master+Electronics, ComponentLink3URL=https://datasheet.octopart.com:443/PTS645SL50SMTR92LFS-C%26K-Components-datasheet-67873720.pdf?src-supplier=Master+Electronics, ComponentLink4Description=https://datasheet.octopart.com:443/PTS645SL50SMTR92LFS-C%26K-Components-datasheet-165782998.pdf?src-supplier=Farnell, ComponentLink4URL=https://datasheet.octopart.com:443/PTS645SL50SMTR92LFS-C%26K-Components-datasheet-165782998.pdf?src-supplier=Farnell, ComponentLink5Description=https://datasheet.octopart.com:443/PTS645SL50SMTR-92-LFS-C%26K-Components-datasheet-150821959.pdf?src-supplier=TME, ComponentLink5URL=https://datasheet.octopart.com:443/PTS645SL50SMTR-92-LFS-C%26K-Components-datasheet-150821959.pdf?src-supplier=TME, ComponentLink6Description=https://datasheet.octopart.com:443/PTS645SL50SMTR92LFS-C%26K-Components-datasheet-138128951.pdf?src-supplier=Future+Electronics, ComponentLink6URL=https://datasheet.octopart.com:443/PTS645SL50SMTR92LFS-C%26K-Components-datasheet-138128951.pdf?src-supplier=Future+Electronics, ComponentLink7Description=http://sigma.octopart.com:80/reach_statement/ITT-company-18.pdf?src-supplier=Compliance+Statements, ComponentLink7URL=http://sigma.octopart.com:80/reach_statement/ITT-company-18.pdf?src-supplier=Compliance+Statements, Contact Material=Bronze, Contact Plating=Silver, Current Rating=50mA, Depth=9mm, Electrical Life=100kcycles, Height=3.45mm, Illumination Type=Non-Illuminated, Lead Free="Lead Free", Length=6mm, Lifecycle Status=Production, Manufacturer Part Number=PTS645SL50SMTR92LFS, Max Current Rating=50mA, Mechanical Life=100kcycles, Mounting Technology="Surface Mount", Number of Positions=1, Orientation=Straight, Packaging="Tape and Reel", Pricing="1=0.35, 10=0.3, 25=0.2804, 100=0.251, 250=0.23256, 500=0.21948 (USD)", REACH SVHC=Yes, RoHS=Compliant, Stock=13861, Supplier=DigiKey, Switch Function=Off-Mom, Termination="Gull Wing", Throw Configuration=SPST, Voltage Rating (DC)=12V
U1: "IC REG LINEAR 3.3V 1A SOT-223", LCSC part number=C6186, Manufacturer="UMW(Youtai Semiconductor Co., Ltd.)", Supplier Part Number=4518-AMS1117-3.3CT-ND, Category="LDO Voltage Regulators", Manufacturer Part Number=AMS1117-3.3, Pricing="1=0.68, 10=0.407, 25=0.3352, 100=0.2538, 250=0.2138, 500=0.18916, 1000=0.16853 (USD)", Stock=9165, Supplier=DigiKey

## Via types
v1: diameter 0.61, hole 0.305, L1 to L2, 91 vias

## Nets (pads, with @x,y where several pads share a name; then routed paths per layer and width w, separated by ;. In a path a pad name is that pad's centre, name@x,y a point inside that pad or via, vN(x,y) a via of type N, cw(c..) or ccw(c..) an arc to the next point about the centre after c; other vN are vias at no path point)
CLK: *1.20
CMD: *1.19
EN: "SWITCH 2.3" *1.3 C6.2 C8.2 Q1.3 R7.1 | length 126.7
  L1 w0.152: v1(35.56,42.941) Q1.3 ; R7.1 v1(36.322,16.256) ; v1(40.132,19.177) C6.2 ; *1.3@65.786,32.165 *1.3 ; v1(65.837,30.302) 66.414,30.879 66.414,32.944 68.014,34.544 87.211,34.544 87.3,34.633 87.3,37.567 ; C8.2@84.562,36.271 86.004,36.271 87.3,37.567 ; 84.925,40.244 86.019,40.244 87.277,38.986 87.3,38.964 87.3,37.567
  L1 w0.381: *1.3@65.786,32.165 65.837,32.114 v1(65.837,30.302)
  L2 w0.152: v1(35.56,42.941) 38.288,42.941 50.927,30.302 v1(65.837,30.302) 65.837,18.542 64.541,17.247 42.748,17.247 41.707,18.288 41.707,19.228 40.716,20.218 39.091,20.218 ; v1(36.322,16.256) 36.322,17.475 36.855,18.009 36.855,19.38 37.694,20.218 39.091,20.218 ; v1(40.132,19.177) 39.091,20.218
EXT_5V: C1.2 C10.2 R11.2 U1.1 | length 60.5
  L1 w0.152: v1(15.24,17.399) C1.2 ; v1(34.417,5.207) 34.421,5.211 U1.1@34.421,7.459 ; C10.2 v1@37.592,19.177 ; R11.2 v1(41.402,16.383)
  L2 w0.152: v1(15.24,17.399) 18.847,17.399 32.563,3.683 33.782,3.683 34.417,4.318 ; v1(34.417,5.207) 34.417,4.318 ; v1(37.719,19.177) 37.719,7.62 ; v1(41.402,16.383) 41.402,11.303 37.719,7.62 ; 34.417,4.318 37.719,7.62
GND: "SWITCH 1.4" "SWITCH 2.4" "SWITCH 3.4" *1.1 *1.15 *1.38 *.2 C2.1 C3.1 C4.1 C5.1 C6.1 C7.1 C8.1 C9.1 C10.1 C11.1 C12.1 D4.2 D6.3 J1.A1-B12 J1.B1-A12 R5.1 R6.1 R10.1 R12.1 R16.1 U1.3 | length 60
  L1 w0.152: v1(3.81,25.654) 6.944,25.654 J1.A1-B12 ; v1(4.826,19.304) 6.964,19.304 J1.B1-A12 ; v1@8.687,7.645 8.763,7.722 v1(8.763,7.823) R6.1 ; v1@13.183,7.899 13.183,9.693 R5.1 ; v1@17.018,27.584 R10.1 ; C4.1 19.431,23.622 v1@19.456,23.647 ; v1@23.749,17.399 v1(23.749,17.526) C5.1 ; U1.3@29.841,7.459 29.841,5.135 v1@29.87,5.105 ; v1@30.48,19.152 30.505,19.177 C10.1 ; v1@31.242,9.652 R12.1 ; C9.1 v1@36.068,31.013 ; v1@41.224,31.039 41.275,30.988 C2.1 ; C6.1 v1(47.092,19.177) ; v1(46.203,30.861) 46.203,28.88 C3.1 ; D4.2 v1@46.228,16.408 ; v1(46.228,16.459) 47.422,16.459 48.92,14.961 *.2 ; *1.15 v1@52.349,28.931 ; 60.122,5.389 61.692,5.389 v1@62.687,4.394 ; v1@68.351,16.281 v1@68.377,16.256 ; v1@79.553,19.507 81.579,19.507 C12.1 ; v1@79.705,9.906 79.731,9.931 C7.1 ; v1@79.705,15.062 79.731,15.037 C11.1 ; v1@79.934,31.75 R16.1 ; v1@80.213,36.22 C8.1 ; 84.696,5.755 84.711,5.74 v1(87.198,5.74) ; v1(90.449,40.208) 92.839,40.208 92.875,40.244 ; v1(90.754,26.238) 90.761,26.238 91.169,25.831 D6.3
  L1 w0.381: *1.38 v1@68.377,16.256 ; v1@68.377,30.302 *1.1
  other v1: 62.738,4.369 29.845,5.232 13.157,7.925 31.267,9.728 79.705,9.957 79.781,15.011 68.351,16.18 30.404,19.177 79.731,19.558 19.456,23.698 16.993,27.584 52.426,28.931 68.402,30.353 41.25,31.14 36.093,31.217 79.832,31.775 80.162,36.246
IO0: "SWITCH 1.3" *1.25 C7.2 Q2.3 | length 99.7
  L1 w0.152: v1(26.416,42.941) Q2.3@26.416,44.196 ; v1(51.841,18.593) 54.572,18.593 56.254,16.911 56.254,13.393 58.572,11.074 87.173,11.074 88.284,9.963 ; *1.25 *1.25@51.943,14.292 ; C7.2 85.192,9.931 86.512,9.931 87.147,9.931 ; 88.252,9.931 87.147,9.931 ; 92.646,5.755 91.324,5.755 87.147,9.931
  L1 w0.381: v1(51.841,18.593) 51.854,18.58 51.854,14.381 *1.25@51.943,14.292
  L2 w0.152: v1(26.416,42.941) 27.676,41.681 38.202,41.681 51.892,27.991 51.892,18.644 v1(51.841,18.593)
IO2: *1.24 R17.2@51.541,6.909 | length 11.6
  L1 w0.152: *1.24 50.367,15.648 50.8,15.215 50.8,7.341 51.181,6.96 R17.2@51.896,6.96
IO4: *1.26
IO5: *1.29
IO12: *1.14
IO13: *1.16
IO14: *1.13
IO15: *1.23
IO16: "SWITCH 3.3" *1.27 | length 21.2
  L1 w0.152: 54.407,16.129 54.984,15.552 54.984,13.487 63.082,5.389 68.072,5.389
  L1 w0.381: *1.27 54.407,16.129
IO17: *1.28
IO18: *1.30
IO19: *1.31
IO21: *1.33 D6.4 R17.1@69.82,9.754 | length 43.9
  L1 w0.152: v1(67.92,9.754) R17.1@69.82,9.754 ; v1(90.754,21.514) 91.169,21.928 D6.4
  L1 w0.381: *1.33 v1@62.027,16.637
  L2 w0.152: v1(62.027,16.688) 62.027,15.646 65.735,11.938 ; v1(67.92,9.754) 65.735,11.938 ; v1(90.754,21.514) 81.178,11.938 65.735,11.938
IO22: *1.36 D6.6 R14.1 | length 49.4
  L1 w0.152: v1(65.837,16.231) 65.176,15.57 65.176,13.183 66.015,12.344 85.954,12.344 92.621,19.012 92.621,21.603
  L1 w0.254: R14.1 91.796,23.698 92.621,22.873 92.621,21.603 92.169,22.055 D6.6
  L1 w0.381: *1.36 v1(65.837,16.231)
IO23: *1.37
IO25: *1.10
IO26: *1.11
IO27: *1.12
IO32: *1.8
IO33: *1.9
IO34: *1.6
IO35: *1.7
NC: *1.32
Net*_1: *.1 R17.1@48.891,6.909 | length 5
  L1 w0.152: R17.1@48.891,6.909 48.92,6.938 *.1
NetC11_2: C11.2 C12.2 R15.1 | length 18.4
  L1 w0.152: C12.2 85.522,19.482 86.296,18.707 ; C11.2@84.458,14.91 84.509,14.961 85.623,14.961 86.296,15.634 86.296,18.707 ; R15.1 84.557,26.391 83.109,24.943 83.109,22.606 86.296,19.418 86.296,18.707
NetCP1_4: CP1.4 J1.A6 J1.B6 | length 35.8
  L1 w0.152: J1.B6@6.973,21.733 3.941,21.733 v1(3.939,21.731) v1(3.939,22.747) 3.943,22.743 J1.A6@6.975,22.743 ; J1.A6 8.562,22.739 14.334,16.967 15.419,16.967 17.348,18.897 17.348,22.201 21.564,26.416 v1(26.289,26.416) CP1.4
NetCP1_5: CP1.5 J1.A7 J1.B7 | length 27.3
  L1 w0.152: v1(5.59,22.239) J1.A7 ; v1(5.602,23.243) 5.604,23.241 J1.B7@6.977,23.241 ; v1(24.232,25.908) 24.236,25.912 27.45,25.912 CP1.5
  L2 w0.152: v1@5.59,22.134 v1(5.59,22.239) ; v1(5.602,23.243) 5.596,23.237 5.596,22.245 v1(5.59,22.239) ; v1(24.232,25.908) 24.206,25.933 15.265,25.933 11.571,22.239 v1(5.59,22.239)
NetCP1_8: CP1.8 R8.2 R10.2 | length 28.8
  L1 w0.152: R8.2 v1(11.303,33.528) ; R10.2 v1(17.018,32.766) ; v1(28.345,22.733) CP1.8
  L2 w0.152: v1(11.303,33.528) 17.78,33.528 ; v1(17.018,32.766) 17.78,33.528 ; v1(28.345,22.733) 28.345,25.757 20.574,33.528 17.78,33.528
NetCP1_9: CP1.9 R9.2 | length 17.3
  L1 w0.152: R9.2 v1(22.606,32.766) ; v1(28.829,21.717) 28.837,21.725 28.837,24.017 CP1.9
  L2 w0.152: v1(22.606,32.766) 28.829,26.543 v1(28.829,21.717)
NetCP1_11: CP1.11 R12.2 | length 10.5
  L1 w0.152: v1(29.845,22.733) CP1.11 ; R12.2 v1(31.242,16.383)
  L2 w0.152: v1(29.845,22.733) 29.845,17.78 v1(31.242,16.383)
NetCP1_24: CP1.24 Q1.2 R2.1 | length 21
  L1 w0.152: R2.1 v1(29.464,36.195) ; CP1.24 30.349,28.811 30.349,32.483 v1(30.353,32.487) ; v1(36.51,40.782) Q1.2
  L2 w0.152: v1(29.464,36.195) 30.342,37.073 ; v1(30.353,32.487) 30.353,37.084 33.147,39.878 ; 33.162,39.878 35.606,39.878 v1(36.51,40.782)
NetCP1_25: CP1.25 R4.1 | length 17
  L1 w0.152: CP1.25 v1(29.845,29.972) ; v1@41.834,35.966 R4.1
  L2 w0.152: v1(29.845,29.972) 35.712,29.972 v1(41.707,35.966)
NetCP1_26: CP1.26 R3.1 | length 17.3
  L1 w0.152: CP1.26 29.345,32.444 v1(29.362,32.461) ; R3.1 v1@38.608,36.068
  L2 w0.152: v1(29.362,32.461) 29.362,31.928 29.718,31.572 34.239,31.572 v1(38.735,36.068)
NetCP1_28: CP1.28 Q2.2 R1.1 | length 32.5
  L1 w0.152: v1@14.097,36.195 R1.1 ; v1(27.366,40.716) Q2.2@27.366,42.195 ; CP1.28 v1(28.345,29.948)
  L2 w0.152: v1(14.224,36.195) 18.097,36.195 ; v1(27.366,40.716) 26.807,41.275 23.177,41.275 18.097,36.195 ; v1(28.345,29.948) 26.567,29.948 22.352,34.163 20.129,34.163 18.097,36.195
NetD4_1: D4.1 R11.1 | length 8.4
  L1 w0.152: v1(41.402,10.16) R11.1@41.402,11.842 ; v1(46.228,10.16) D4.1
  L2 w0.152: v1(41.402,10.16) v1(46.228,10.16)
NetD6_2: D6.2 R16.2 | length 10.6
  L1 w0.152: R16.2 86.741,31.75 91.669,26.822 D6.2
NetJ1_A5: J1.A5 R5.2 | length 23.5